# Altium PCB RCU1.PcbDoc
Units mil, origin at the board's own origin, x right, y up, seen from the top; angles counter-clockwise.
Board outline 6000 x 4000 mil, 2 copper layers (Top Layer, Bottom Layer); 31 components, 22 nets, 128 pads, 7 vias.
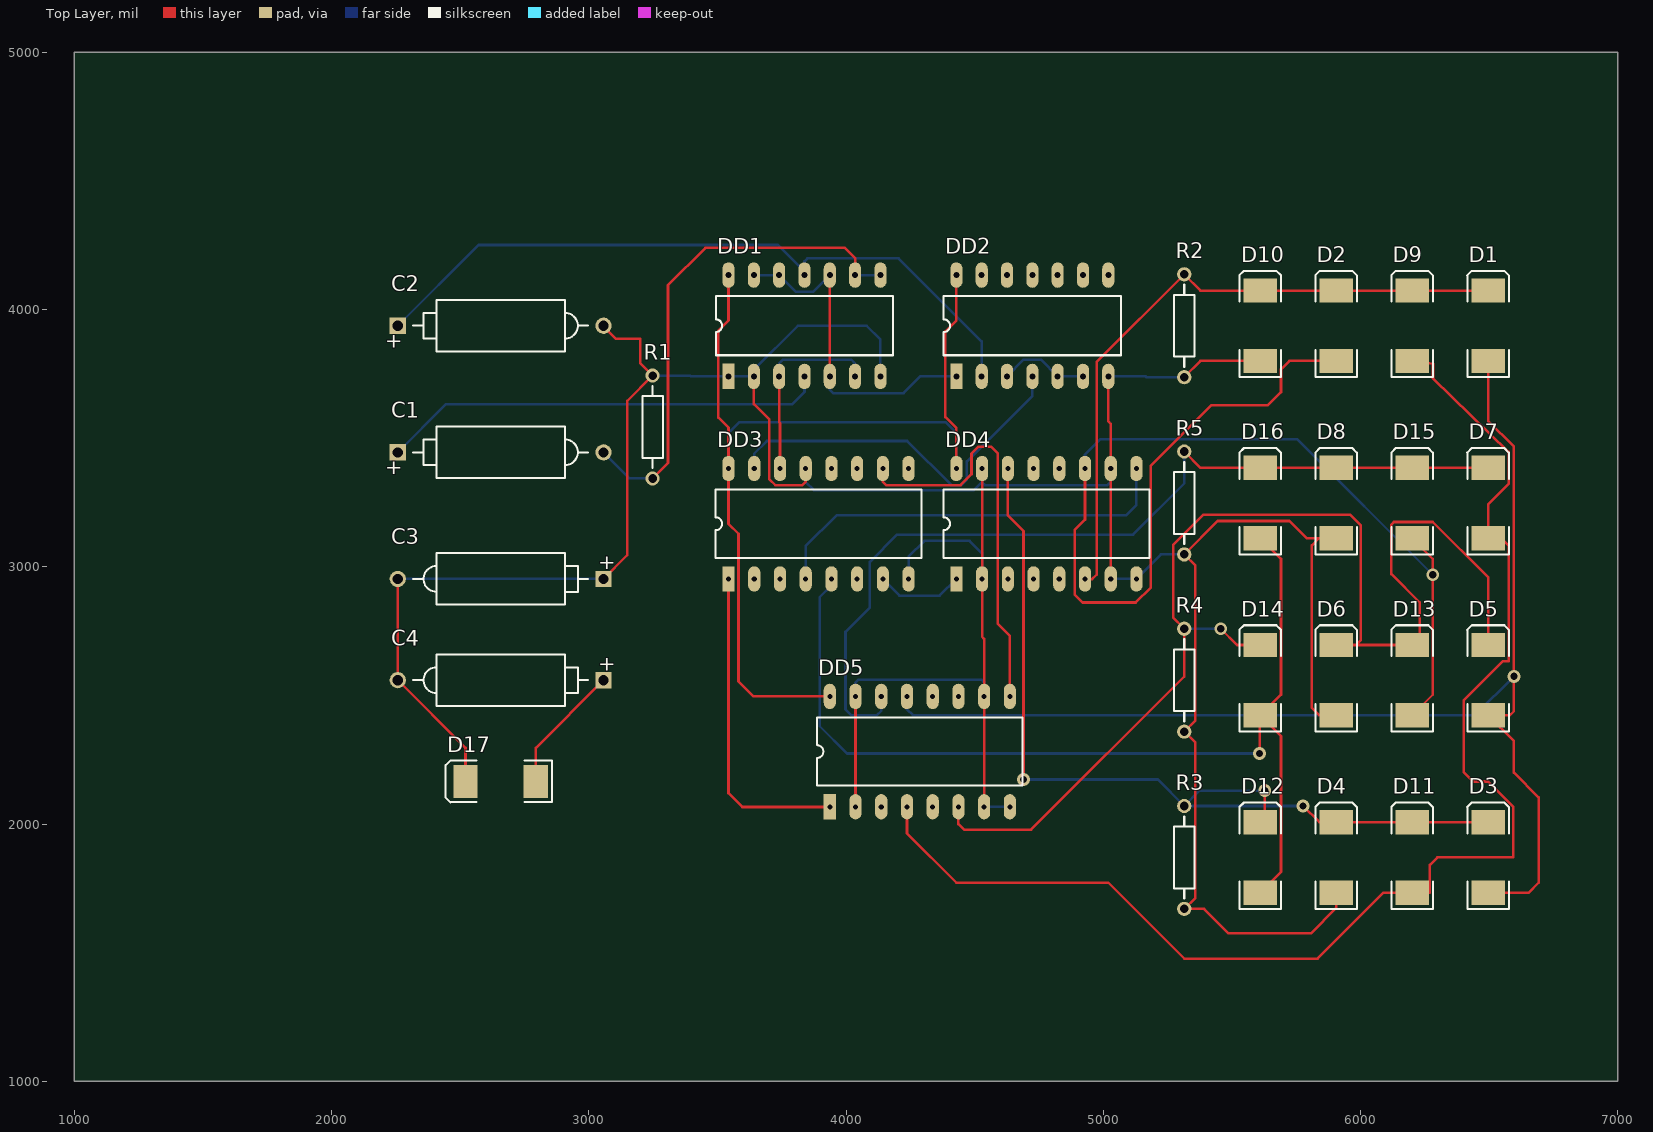
[diagram p0: Top Layer view]
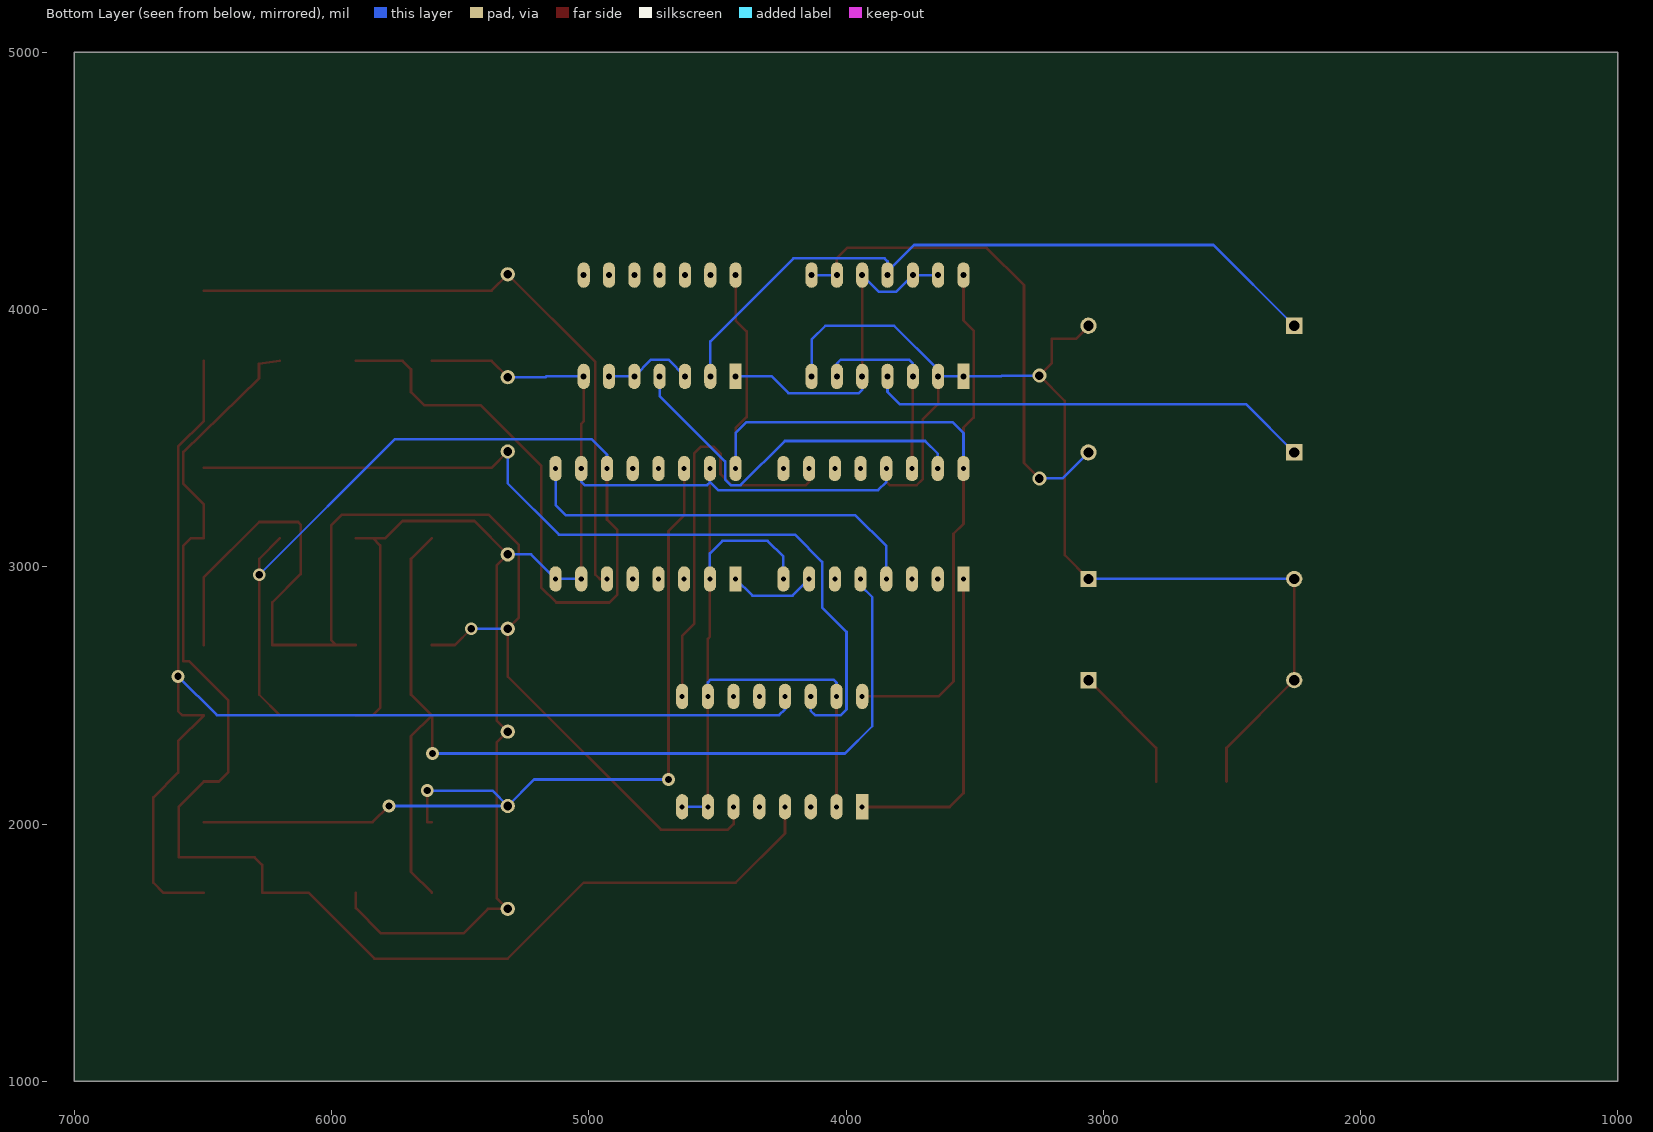
[diagram p1: Bottom Layer view, seen from below]

## Layer stack, top to bottom
Top Solder: solder mask 0.4, Solder Resist, Dk 3.5
Top Layer: signal copper 1.4
Dielectric1: dielectric 12.6, FR-4, Dk 4.8
Bottom Layer: signal copper 1.4
Bottom Solder: solder mask 0.4, Solder Resist, Dk 3.5

## Board outline
1000,1000 7000,1000 7000,5000 1000,5000

## Design rules (kind name [scope] priority, off if disabled: settings)
Clearance [All] p1: gap=10
PolygonConnect [All] p1: connectstyle=Relief reliefconductorwidth=10 reliefentries=4 polygonreliefangle="90 Angle" airgapwidth=10
RoutingVias [All] p1: holewidth=28 width=50 viastyle="Through Hole" minholewidth=28 minwidth=50 maxholewidth=28 maxwidth=50
SolderMaskExpansion [All] p1: expansion=4
Width [All] p1: maxlimit=10 minlimit=10 preferedwidth=10
30 further rules are at their usual default settings.

## Components (designator, comment, footprint, x,y, rotation, side; value= is the part's Value field where it differs from the comment)
C1 "" POLAR0.8 2657.48,3444.88 r180 top
C2 "" POLAR0.8 2657.48,3937.01 r180 top
C3 "Cap Pol2" POLAR0.8 2657.48,2952.76 r0 top
C4 "Cap Pol2" POLAR0.8 2657.48,2559.06 r0 top
D1 "Diode" SMC 6496.06,3937.01 r90 top
D2 "Diode" SMC 5905.51,3937.01 r90 top
D3 "Diode" SMC 6496.06,1870.08 r90 top
D4 "Diode" SMC 5905.51,1870.08 r90 top
D5 "Diode" SMC 6496.06,2559.06 r90 top
D6 "Diode" SMC 5905.51,2559.06 r90 top
D7 "Diode" SMC 6496.06,3248.03 r90 top
D8 "Diode" SMC 5905.51,3248.03 r90 top
D9 "Diode" SMC 6200.79,3937.01 r90 top
D10 "Diode" SMC 5610.24,3937.01 r90 top
D11 "Diode" SMC 6200.79,1870.08 r90 top
D12 "Diode" SMC 5610.24,1870.08 r90 top
D13 "Diode" SMC 6200.79,2559.06 r90 top
D14 "Diode" SMC 5610.24,2559.06 r90 top
D15 "Diode" SMC 6200.79,3248.03 r90 top
D16 "Diode" SMC 5610.24,3248.03 r90 top
D17 "Diode" SMC 2657.48,2165.35 r180 top
DD1 "" DIP14 3543.31,3740.16 r90 top
DD2 "" DIP14 4429.13,3740.16 r90 top
DD3 "L_DD3" DIP16 3543.31,2952.76 r90 top
DD4 "L_DD4" DIP16 4429.13,2952.76 r90 top
DD5 "L_DD5" DIP16 3937.01,2066.93 r90 top
R1 "" AXIAL-0.4 3248.03,3543.31 r270 top
R2 "Res2" AXIAL-0.4 5314.96,3937.01 r90 top
R3 "Res2" AXIAL-0.4 5314.96,1870.08 r90 top
R4 "Res2" AXIAL-0.4 5314.96,2559.06 r90 top
R5 "Res2" AXIAL-0.4 5314.96,3248.03 r90 top

## Footprints (in the part's own frame and the unit in brackets; to place one, negate y for a bottom-side part, rotate by r counter-clockwise, add the part's x,y. Pads: shape width x height; smd on the part's side, far side on the other; paste and mask are expansions set on the pad)
AXIAL-0.4 [mm] "Axial Device, Thru-Hole; 2 Leads; 0.4 in Pin Spacing"
  round 1.4 hole 0.85: 1(-5.08,0) 2(5.08,0)
  silkscreen extent -4.06,-1.02 4.06,1.02
DIP14 [mm]
  rect 2.5x1.2 hole 0.6: 1(0,0)
  oval 2.5x1.2 hole 0.6: 2(0,-2.5) 3(0,-5) 4(0,-7.5) 5(0,-10) 6(0,-12.5) 7(0,-15) 8(10,-15) 9(10,-12.5) 10(10,-10) 11(10,-7.5) 12(10,-5) 13(10,-2.5) 14(10,0)
  silkscreen extent 2.08,-16.25 7.91,1.25
DIP16 [mm]
  rect 2.5x1.2 hole 0.5: 1(0,0)
  oval 2.5x1.2 hole 0.5: 2(0,-2.54) 3(0,-5.08) 4(0,-7.62) 5(0,-10.16) 6(0,-12.7) 7(0,-15.24) 8(0,-17.78) 9(10.9,-17.78) 10(10.9,-15.24) 11(10.9,-12.7) 12(10.9,-10.16) 13(10.9,-7.62) 14(10.9,-5.08) 15(10.9,-2.54) 16(10.9,0)
  silkscreen extent 2.09,-19.05 8.82,1.27
POLAR0.8 [mm] "Polarized Capacitor; 2 Leads"
  rect 1.6x1.6 hole 1: 1(10.16,0)
  round 1.6 hole 1: 2(-10.16,0)
  silkscreen extent -8.64,-2.54 8.64,2.54
SMC [mm] "DO-214-AB/SMC; 2 C-Bend Leads; Body 7.9 x 5.9 mm, inc. leads (LxW)"
  rect 2.4x3.3 smd: 1(-3.475,0) 2(3.475,0)
  silkscreen extent -5.08,-2.05 5.42,2.05

## Part data
C1 C2: library part "Cap Pol2", "Polarized Capacitor (Axial)"
C3 C4: "Polarized Capacitor (Axial)"
D1 D2 D3 D4 D5 D6 D7 D8 D9 D10 D11 D12 D13 D14 D15 D16 D17: "Default Diode"
DD1 DD2: library part L_DD1
R1: library part Res2, "Resistor"
R2 R3 R4 R5: "Resistor"

## Via types
v1: diameter 50, hole 28, Top Layer to Bottom Layer, 7 vias

## Nets (pads, with @x,y where several pads share a name; then routed paths per layer and width w, separated by ;. In a path a pad name is that pad's centre, name@x,y a point inside that pad or via, vN(x,y) a via of type N, cw(c..) or ccw(c..) an arc to the next point about the centre after c; other vN are vias at no path point)
1: C2.2 C3.1 C3.2 C4.2 D4.1 D6.1 D8.1 D10.1 D17.2 DD1.1 DD1.2 DD1.7 DD2.7 DD3.8 DD3.13 DD4.2 DD4.7 DD4.8 DD4.10 DD4.15 DD5.2 DD5.7 DD5.8 DD5.10 DD5.15 R1.1 R2.1 R3.1 R4.1 R5.1 | length 14404
  Top Layer w10: C3.2 C4.2 2520.67,2295.86 D17.2 ; C3.1 3149.61,3044.88 3149.61,3644.88 R1.1 3200.39,3790.94 3200.39,3886.22 3105.12,3886.22 3057.48,3933.86 C2.2 ; DD1.2 3641.73,3632 3702,3571.73 3702,3340 3725,3317 3830.31,3317 3843.31,3330 DD3.13 ; DD5.2 DD5.15 ; DD4.15 DD4.2 4529.13,2727.88 4537.01,2720 DD5.10 DD5.7 ; DD2.7 5019.69,3565.45 5029.13,3556 DD4.10 DD4.7 ; R2.1 5378.15,3800.2 D10.1 ; D4.1 5905.51,1673.23 5807.09,1574.8 5487.64,1574.8 5392.37,1670.08 R3.1 5358,1713.12 5358,2316.02 R4.1 5358,2402.1 5358,3004.99 R5.1 5444.93,3178 5724,3178 5790.78,3111.22 5839,3111.22 ; D6.1 5840,2422.24 5811,2451.24 5811,3083.22 5839,3111.22 ; D8.1 5839,3111.22
  Bottom Layer w10: C3.2 C3.1 ; R1.1 3394,3743.31 3397.15,3740.16 DD1.1 DD1.2 3641.73,3766 3812.73,3937 4080,3937 4133.86,3883.14 DD1.7 ; DD3.13 3843.31,3330 3875.63,3297.68 4496.81,3297.68 4529.13,3330 ; DD5.15 4037.01,2550 4048.01,2561 4526.01,2561 4537.01,2550 DD5.10 ; DD3.8 4243.31,3040 4304.31,3101 4480,3101 4529.13,3051.87 DD4.2 ; DD4.15 4529.13,3330 ; DD5.7 DD5.8 ; DD2.7 5165,3740.16 5168.15,3737.01 R2.1 ; DD4.7 DD4.8 5224.41,3048.03 R5.1 ; DD4.10 5029.13,3330 5016.13,3317 4540,3317 4529.13,3327.87 4529.13,3330
2: D1.1 D3.1 D5.1 DD5.13 | length 4938
  Top Layer w10: D3.1 6654.53,1733.27 6692.91,1771.65 6692.91,2103.13 6596.03,2200.02 6596.03,2322.28 D5.1 6580,2422.24 6596.03,2438.27 v1@6596.03,2574 ; D1.1 6496,3800.2 6496,3567 6596.03,3466.97 v1@6596.03,2574 ; v1(6597,2574) v1@6596.03,2574
  Bottom Layer w10: DD5.13 4237.01,2445.99 4260,2423 6446,2423 v1(6597,2574)
3: D7.1 D9.1 D11.1 DD5.4 | length 5310.9
  Top Layer w10: DD5.4 4237.01,1963.78 4429.13,1771.65 5019.69,1771.65 5314.96,1476.38 5833.11,1476.38 6090,1733.27 D11.1 6270,1733.27 6270,1841 6299.08,1870.08 6594.49,1870.08 6594.49,2066.93 6496.06,2165.35 6437.65,2165.35 6401,2202 6401,2480 6554,2633 6576.03,2633 6576.03,3082.2 6547,3111.22 D7.1 6496,3111.22 6496,3242.57 6576.03,3322.6 6576.03,3447.09 6282,3732 6282,3790 D9.1
4: D2.1 D13.1 D15.1 DD4.11 | length 4657.4
  Top Layer w10: DD4.11 4929.13,3183.13 4890,3144 4890,2891 4920,2861 5126,2861 5185,2920 5185,3393 5420,3628 5640,3628 5691,3679 5691,3767.2 5724,3800.2 D2.1 ; D13.1 6281,2502.46 v1(6281,2969) 6281,3031.01 D15.1
  Bottom Layer w10: DD4.11 4929.13,3436.13 4989,3496 5754,3496 v1(6281,2969)
6: D12.1 D14.1 D16.1 DD3.5 | length 4007.7
  Top Layer w10: v1(5608,2274) 5608,2422.24 D14.1 ; D12.1 5691,1814.03 5691,2341.48 D14.1 ; D16.1 5691,3030.46 5691,2503.01 D14.1
  Bottom Layer w10: DD3.5 3943.31,2927 3898,2881.69 3898,2380 4004,2274 v1(5608,2274)
+9: C4.1 D17.1 | length 502.7
  Top Layer w10: D17.1 2794.29,2295.87 C4.1
NetC1_1: C1.1 DD1.4 | length 1738.6
  Bottom Layer w10: C1.1 2443.6,3631 3789.58,3631 3838.58,3680 DD1.4
NetC1_2: C1.2 DD1.8 DD1.9 R1.2 | length 1977.8
  Top Layer w10: R1.2 3308,3403.27 3308,4095 3453,4240 3995.43,4240 4035.43,4200 DD1.9
  Bottom Layer w10: C1.2 3159.06,3343.31 R1.2 ; DD1.9 DD1.8
NetC2_1: C2.1 DD1.11 DD2.2 | length 2770.9
  Bottom Layer w10: C2.1 2571.47,4251 3735.58,4251 DD1.11@3838.58,4148 ; DD1.11 DD1.11@3838.58,4148 ; DD2.2 4527.56,3876 4204.56,4199 3850,4199 3838.58,4187.58 DD1.11@3838.58,4148
NetD1_2: D1.2 D2.2 D9.2 D10.2 DD4.6 R2.2 | length 2569.2
  Top Layer w10: DD4.6 4929.13,2952 4957,2952 4974,2969 4974,3796.05 R2.2 5378.15,4073.82 D10.2 D2.2 D9.2 D1.2
NetD3_2: D3.2 D4.2 D11.2 D12.2 DD4.14 R3.2 | length 3587.7
  Top Layer w10: DD4.14 4629.13,3199.87 4690,3139 v1(4690,2173) ; D12.2 5628,2006.89 v1(5628,2130) ; v1(5776.81,2070.08) 5840,2006.89 D4.2 D11.2 D3.2
  Bottom Layer w10: v1(4690,2173) 5212.04,2173 R3.2 ; v1(5628,2130) 5374.88,2130 R3.2 ; v1(5776.81,2070.08) R3.2
NetD5_2: D5.2 D6.2 D13.2 D14.2 DD5.6 R4.2 | length 4892
  Top Layer w10: DD5.6 4437.01,2000 4459.01,1978 4720,1978 5314.96,2572.96 R4.2 5272,2802.02 5272,3085 5390,3203 5960,3203 6001,3162 6001,2713.87 5983,2695.87 ; v1(5456.81,2759.06) 5520,2695.87 D14.2 ; D6.2 5983,2695.87 ; D5.2 6497,2695.87 6497,2958 6281,3174 6130,3174 6120,3164 6120,2972 6230,2862 6230,2695.87 D13.2 5983,2695.87
  Bottom Layer w10: R4.2 v1(5456.81,2759.06)
NetD7_2: D7.2 D8.2 D15.2 D16.2 DD5.14 R5.2 | length 3504.2
  Top Layer w10: R5.2 5378.15,3384.84 D16.2 D8.2 D15.2 D7.2
  Bottom Layer w10: DD5.14 4137.01,2440 4120.01,2423 4020,2423 3998,2445 3998,2747 4093,2842 4093,3019 4199,3125 5116,3125 5314.96,3323.96 R5.2
NetDD1_3: DD1.3 DD1.6 DD3.14 | length 767
  Top Layer w10: DD1.3 3740.16,3562.15 3743.31,3559 DD3.14
  Bottom Layer w10: DD1.3 3740.16,3790 3755.16,3805 4020.43,3805 4035.43,3790 DD1.6
NetDD1_5: DD1.5 DD1.10 DD1.12 DD1.13 DD2.1 | length 1320.6
  Top Layer w10: DD1.5 DD1.10
  Bottom Layer w10: DD1.13 DD1.12 3805.01,4069 3872.15,4069 DD1.10 ; DD1.5 3937.01,3687.99 3950,3675 4224,3675 4290,3741 4429.13,3741 DD2.1
NetDD2_3: DD2.3 DD2.5 DD2.6 | length 349
  Bottom Layer w10: DD2.3 4690.83,3805 4757.99,3805 DD2.5 DD2.6
NetDD2_4: DD2.4 DD3.15 | length 1491.4
  Bottom Layer w10: DD3.15 3643.31,3440 3692.31,3489 4238,3489 4409.32,3317.68 4448.68,3317.68 4470,3339 4470,3409.59 4724.41,3664 DD2.4
NetDD3_1: DD3.1 DD5.1 | length 1249.8
  Top Layer w10: DD3.1 3543.31,2120 3597.31,2066 3937.01,2066 DD5.1
NetDD3_4: DD3.4 DD4.9 | length 1621.2
  Bottom Layer w10: DD3.4 3843.31,3080 3963.31,3200 5089.13,3200 5129.13,3240 DD4.9
NetDD3_7: DD3.7 DD4.1 | length 339.5
  Bottom Layer w10: DD3.7 4208.06,2888 4364.38,2888 DD4.1
NetDD3_10: DD3.10 DD5.9 | length 1587.6
  Top Layer w10: DD3.10 4143.31,3330 4156.31,3317 4445,3317 4488,3360 4488,3440 4515,3467 4563,3467 4590,3440 4590,2778 4637.01,2730.99 DD5.9
Power: DD1.14 DD2.14 DD3.16 DD4.16 DD5.16 | length 3991.3
  Top Layer w10: DD1.14 3543.31,3957.31 3504,3918 3504,3580.31 3543.31,3541 DD3.16 3543.31,3167 3582,3128.31 3582,2554 3640,2496 3937.01,2496 DD5.16 ; DD4.16 4429.13,3538.87 4386,3582 4386,3914.87 4429.13,3958 DD2.14
  Bottom Layer w10: DD3.16 3543.31,3520 3584.31,3561 4388.13,3561 4429.13,3520 DD4.16
pads on no net: DD2.8 DD2.9 DD2.10 DD2.11 DD2.12 DD2.13 DD3.2 DD3.3 DD3.6 DD3.9 DD3.11 DD3.12 DD4.3 DD4.4 DD4.5 DD4.12 DD4.13 DD5.3 DD5.5 DD5.11 DD5.12

## Text inside footprints (layer, text, board x,y; h text height)
C1: Top Overlay "+" at 2277.48,3407.48 h59.06 r180
C2: Top Overlay "+" at 2277.48,3899.61 h59.06 r180
C3: Top Overlay "+" at 3037.48,2990.16 h59.06
C4: Top Overlay "+" at 3037.48,2596.46 h59.06